# Altium PCB ESP32 with USBC.PcbDoc (part 3 of 3)
Units mil, origin at the board's own origin, x right, y up, seen from the top; angles counter-clockwise.
Board outline 2675 x 1175 mil, 4 copper layers (L1, L2, L3, L4), stack 61.583 mil thick; 64 components, 73 nets, 299 pads, 163 vias.
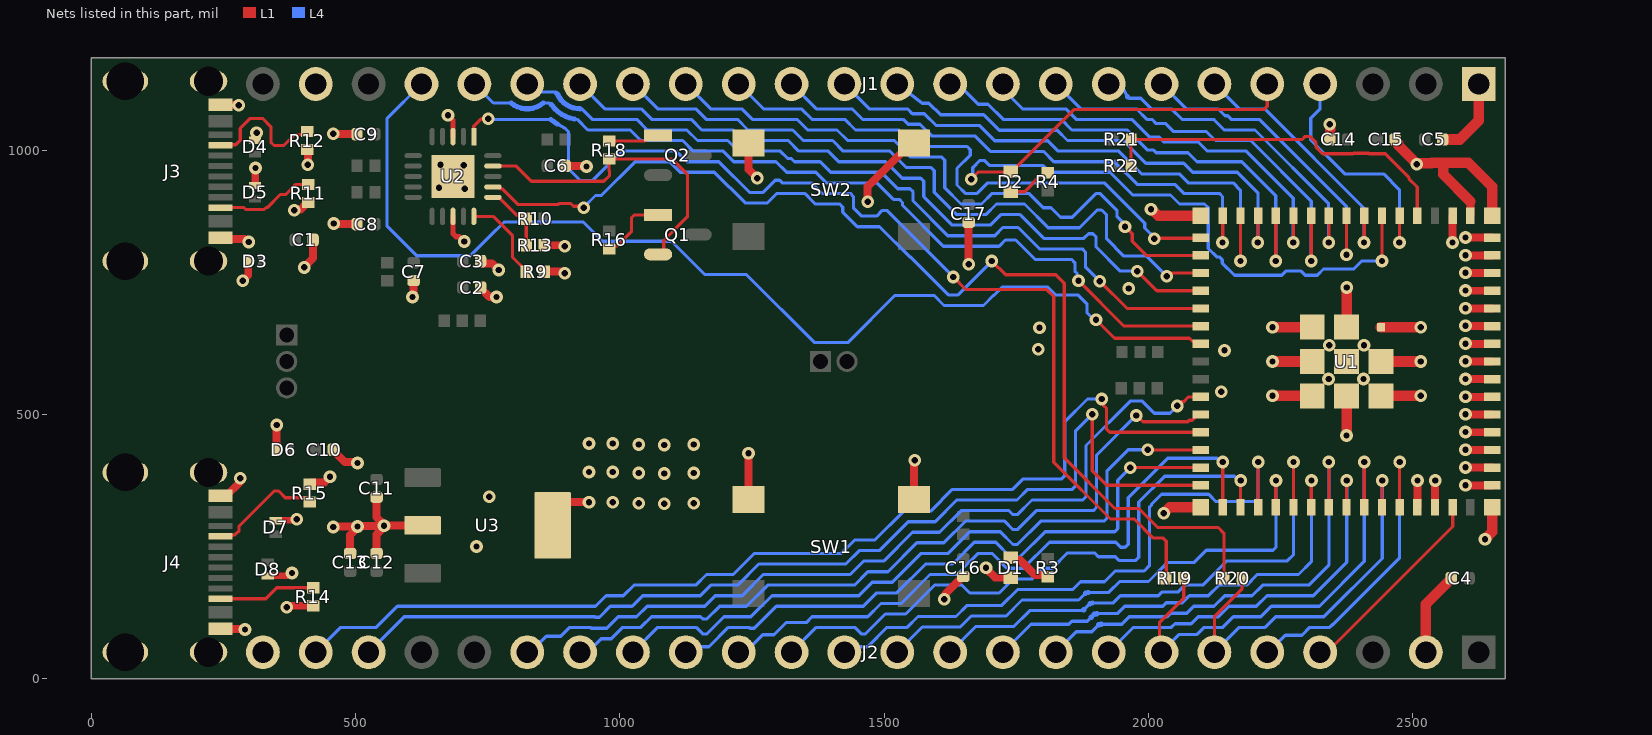
[diagram p4: the nets of this part, all layers, seen from the top]

## Via types
v1: diameter 24, hole 12, L1 to L4, tented both sides, 163 vias

## Nets (pads, with @x,y where several pads share a name; then routed paths per layer and width w, separated by ;. In a path a pad name is that pad's centre, name@x,y a point inside that pad or via, vN(x,y) a via of type N, cw(c..) or ccw(c..) an arc to the next point about the centre after c; other vN are vias at no path point) (continued)
GND: C1.2 C2.1 C3.2 C4.2 C5.2 C6.2 C7.2 C8.2 C9.2 C10.2 C11.1 C12.1 C13.1 C14.1 C15.2 C16.1 C17.2 D1.1 D3.1 D4.1 D5.1 D6.1 D7.1 D8.1 J1.1 J1.23 J2.2 J2.24 J3.A1B12 J3.B1A12 J3.S1 J3.S2 J3.S3 J3.S4 J4.A1B12 J4.B1A12 J4.S1 J4.S2 J4.S3 J4.S4 R9.2 R11.1 R12.1 R13.1 R14.1 R15.1 SW1.3 SW1.4 SW2.3 SW2.4 U1.1 U1.2 U1.42 U1.43 U1.46 U1.47 U1.48 U1.49 U1.50 U1.51 U1.52 U1.53 U1.54 U1.55 U1.56 U1.57 U1.58 U1.59 U1.60 U1.61 U1.62 U1.63 U1.64 U1.65 U1.66 U1.67 U1.68 U1.69 U1.70 U1.71 U1.72 U1.73 U2.3 U2.13 U2.21 U3.2 U3.4 | length 4561.6
  L1 w10.01: v1(675,1066) 684.59,1056.41 U2.3@684.59,1025.41 ; U2.13@684.59,874.59 684.59,841.86 690.45,836 697,836 v1(706,827) ; v1@1242,428 v1(1243.5,426.5)
  L1 w12: D8.1@334,194.41 371.16,194.41 376.75,200 v1(380,200) ; D7.1@349,299 349.89,299.89 387.48,299.89 v1(389,301.41)
  L1 w15: J4.B1A12@244.84,94.02 289.98,94.02 v1(291,93) ; J4.A1B12@244.84,345.98 255.67,345.98 281,371.32 281,378 v1(282,379) ; J3.B1A12@244.84,834.02 247.27,831.58 289.98,831.58 295.56,826 v1(298,826) ; J3.A1B12@244.84,1085.98 245.33,1085.49 278.51,1085.49 v1(279,1085) ; v1(287,753) 297.2,763.2 D3.1@297.2,790 ; D5.1@310,933 310.5,933.5 310.5,965.5 v1(311,966) ; D4.1@310,1018.8 310.89,1018.8 311.5,1019.41 311.5,1031.5 v1(313,1033) ; v1(351,480) 351,443.9 D6.1@352.41,442.49 ; v1(370,135) 372.99,137.99 R14.1@420,137.99 ; v1(384,886) 385.72,887.72 396.55,887.72 406.69,897.86 407.87,897.86 R11.1@411,900.99 ; v1(403,778) 403,778.69 420,795.69 C1.2@420,830 ; R12.1@409,1000.99 410,999.99 v1(410,972) ; R15.1@414,368.01 417.13,371.14 441.14,371.14 v1(452,382) ; C10.2@457.86,433 457.86,431.82 479.95,409.72 502.28,409.72 v1(504,408) ; v1(458,287) 458.5,287.5 503.5,287.5 v1(504,288) ; v1(458,1031) 459,1030 C9.2@503.07,1030 ; v1(459,861) 460,860 C8.2@503.07,860 ; C13.1@490,236.93 490,271.56 504,285.56 v1(504,288) ; C12.1@540,236.93 540,272.56 554,286.56 v1(554,289) ; C11.1@540,343.07 540,305.44 554,291.44 v1(554,289) ; v1(608,722) 610,724 C7.2@610,753.07 ; U3.2@626.97,290 626.47,289.5 554.5,289.5 v1(554,289) ; C2.1@736.93,740 736.93,738.82 753.75,722 v1(767,722) ; C3.2@736.93,790 736.93,788.82 740.06,785.69 758.31,785.69 v1(771,773) ; R9.2@857.01,770 893,770 v1(896,767) ; R13.1@857.01,820 894,820 v1(896,818) ; U3.4@873.03,290 873.03,307.05 899.98,334 v1(942,334) ; C6.2@896.93,970 897.43,969.5 936.5,969.5 v1(937,969) ; SW1.4@1243.5,338.58 v1(1243.5,426.5) ; SW2.4@1243.5,1013.58 1243.5,963.5 v1(1260,947) ; v1(1469,902) 1469,931.01 1551.57,1013.58 SW2.3@1556.5,1013.58 ; SW1.3@1556.5,338.58 1556.5,410.5 1558,412 v1(1558,413) ; v1(1614,150) 1616,152 1616,160.25 1648.82,193.07 C16.1@1650,193.07 ; v1(1660,784) C17.2@1660,863.07 ; v1(1693,210) 1694,209 1694,207.6 1710.3,191.3 D1.1@1740,191.3 ; C14.1@2343.07,1020 C14.1@2344.04,1020.96 ; C15.2@2466.93,1020 C15.2@2473.01,1013.92 ; U1.42@2508.9,324.41 v1@2508.9,374.57 ; U1.43@2542.36,324.41 v1@2542.36,374.57 ; C4.2@2573.07,188.82 C4.2@2573.07,190 ; v1@2575.83,825.43 U1.2@2575.83,875.59 ; v1@2600.47,365.75 U1.46@2650.63,365.75 ; v1@2600.47,399.21 U1.47@2650.63,399.21 ; v1@2600.47,432.68 U1.48@2650.63,432.68 ; v1@2600.47,466.14 U1.49@2650.63,466.14 ; v1@2600.47,499.61 U1.50@2650.63,499.61 ; v1@2600.47,533.07 U1.51@2650.63,533.07 ; v1@2600.47,566.54 U1.52@2650.63,566.54 ; v1@2600.47,600 U1.53@2650.63,600 ; v1@2600.47,633.46 U1.54@2650.63,633.46 ; v1@2600.47,666.93 U1.55@2650.63,666.93 ; v1@2600.47,700.39 U1.56@2650.63,700.39 ; v1@2600.47,733.86 U1.57@2650.63,733.86 ; v1@2600.47,767.32 U1.58@2650.63,767.32 ; v1@2600.47,800.79 U1.59@2650.63,800.79 ; v1@2600.47,834.25 U1.60@2650.63,834.25 ; U1.1@2609.29,875.59 2609.29,902.71 ; v1(504,288) 504.5,288.5 553.5,288.5 v1(554,289)
  L1 w20: v1(2005,888) 2006.08,888 2018.49,875.59 U1.63@2099.45,875.59 ; v1(2029,313) 2040.41,324.41 U1.64@2099.45,324.41 ; v1(2235,665) 2245,665 2245.04,664.96 U1.71@2310.08,664.96 ; v1@2245.04,535.04 U1.73@2310.08,535.04 ; v1@2245.04,600 U1.72@2310.08,600 ; v1(2343,1049) 2343.77,1048.23 2343.77,1021.23 C14.1@2344.04,1020.96 ; v1@2375.04,470 U1.70@2375.04,535.04 ; U1.69@2375.04,664.96 v1@2375.04,730 ; U1.68@2440,535.04 v1@2505.04,535.04 ; U1.67@2440,600 v1@2505.04,600 ; U1.66@2440,664.96 v1@2505.04,664.96 ; C15.2@2467.56,1018.19 2473.01,1012.73 2473.01,1009.07 2508,974.08 v1(2508,973) 2509.72,974.72 2535.51,974.72 2536.79,976 2558,976 ; J2.2@2525,50 2525,140.75 C4.2@2573.07,188.82 ; C5.2@2556.93,1020 2589,1020 2625,1056 J1.1@2625,1125 ; 2609.29,902.71 2558,954 2558,976 ; v1(2637,264) 2650.63,277.63 U1.65@2650.63,324.41 ; U1.62@2650.63,875.59 2650.63,930.37 2605,976 2558,976
  other v1: 729,250 1084,331 1036,332 1140,332 987,334 753,344 2600.04,366.18 2509.33,375 2542.8,375 1084,388 1036,389 1140,389 942,391 987,391 2600.04,399.65 2600.04,433.11 1084,442 1036,443 1140,443 942,445 987,445 2375,459.96 2600.04,466.57 2600.04,500.04 2600.04,533.5 2235,535.08 2515.08,535 2138,543 2341,567 2407,567 2600.04,566.97 2235,600.04 2515.08,599.96 2600.04,600.43 2144,621 1792,623 2342,631 2408,631 2600.04,633.9 1794,664 2515.08,664.92 2600.04,667.36 2600.04,700.83 2600.04,734.29 1963,738 2375.08,740.04 2600.04,767.76 2600.04,801.22 2575.39,825 2600.04,834.69 707,927 658,929 705,971 661,972
GPIO0: R21.2 R22.2 U1.4 | length 695.4
  L1 w6: R22.2@1967.01,970 R21.2@1967.01,1020 2291,1020 2296.86,1025.86 2305.14,1025.86 2317.34,1013.66 2317.34,1005.38 2329.53,993.19 2387.19,993.19 2388,994 2416.9,994 2417.71,993.19 2448.19,993.19 2493,948.38 2493,946 2508.9,930.1 U1.4@2508.9,875.59
GPIO1: J1.4 U1.5 | length 470.8
  L1 w6: v1(2475,825) 2475.43,825.43 U1.5@2475.43,875.59
  L4 w6: J1.4@2325,1125 2325,1078.18 2307.23,1060.41 2307.23,1019.06 2371.28,955 2445,955 2475,925 v1(2475,825)
GPIO2: D2.1 J1.5 U1.6 | length 1704.3
  L1 w6: v1(1665,945) 1678.7,958.7 D2.1@1740,958.7 1741.97,958.7 1860.13,1076.86 2219.14,1076.86 2225,1082.72 J1.5@2225,1125 ; v1(2441.97,790.04) U1.6@2441.97,875.59
  L4 w6: v1(1665,945) 1667.68,947.68 1667.68,966.68 1681.56,980.56 1689.84,980.56 1699.4,971 1800.01,971 1813.01,958 1927.46,958 1970.46,915 2041.86,915 2058.86,898 2106.35,898 2113.35,891 2113.35,813.82 2129.17,798 2134.14,798 2140,792.14 2140,786.11 2163.07,763.04 2252.36,763.04 2260.31,770.98 2288.98,770.98 2296.93,763.04 2319.48,763.04 2331.44,775 2388.57,775 2403.61,790.04 v1(2441.97,790.04)
GPIO3: J1.6 U1.7 | length 495.5
  L1 w6: v1@2408.5,825.43 U1.7@2408.5,875.59
  L4 w6: J1.6@2125,1125 2172,1078 2220,1078 2408.07,889.93 v1(2408.07,825)
GPIO4: J1.7 U1.8 | length 610.7
  L1 w6: v1(2375,802) U1.8@2375.04,875.59
  L4 w6: J1.7@2025,1125 2072,1078 2132,1078 2145,1065 2150,1065 2157,1058 2210,1058 2375.04,892.96 v1(2375,802) v1(2375,802)
GPIO5: J1.8 U1.9 | length 637.2
  L1 w6: v1@2341.57,825.43 U1.9@2341.57,875.59
  L4 w6: J1.8@1925,1125 1945.1,1125 1950.96,1119.14 1959.29,1102.25 1960.6,1100.93 1963.53,1098 1985.53,1098 2005.53,1078 2043.72,1078 2063.72,1058 2123.72,1058 2126.64,1055.07 2143.72,1038 2201.72,1038 2341.14,898.57 v1(2341.14,825)
GPIO6: J1.9 U1.10 | length 773.8
  L1 w6: v1(2308.11,790.04) U1.10@2308.11,875.59
  L4 w6: J1.9@1825,1125 1872,1078 1977.25,1078 1977.63,1077.62 1997.25,1058 2007,1058 2015,1050 2033,1050 2048,1035 2110,1035 2127,1018 2193.43,1018 2308.11,903.32 v1(2308.11,790.04)
GPIO7: J1.10 U1.11 | length 778.7
  L1 w6: v1@2274.65,825.43 U1.11@2274.65,875.59
  L4 w6: J1.10@1725,1125 1725,1115 1762,1078 1843.72,1078 1863.72,1058 1968.88,1058 2001.88,1025 2020,1025 2030,1015 2095,1015 2112,998 2185.15,998 2274.21,908.93 v1(2274.21,825)
GPIO8: J1.11 U1.12 | length 912.9
  L1 w6: v1(2241.18,790.04) U1.12@2241.18,875.59
  L4 w6: J1.11@1625,1125 1639.61,1125 1655.35,1109.27 1655.73,1109.27 1678.23,1086.77 1696.77,1086.77 1725.53,1058 1835.43,1058 1855.43,1038 1960.6,1038 1998.6,1000 2010,1000 2015,995 2075,995 2092,978 2176.86,978 2241.18,913.68 v1(2241.18,790.04)
GPIO9: J1.12 U1.13 | length 942.5
  L1 w6: v1@2207.72,825.43 U1.13@2207.72,875.59
  L4 w6: J1.12@1525,1125 1572.33,1088.73 1584.55,1088.73 1607.43,1066.77 1610.66,1066.77 1688.48,1066.77 ; 1654.95,1066.77 1688.48,1066.77 ; v1(2207.28,825) 2207.28,919.3 2168.58,958 2083.72,958 2066.72,975 1995.32,975 1952.32,1018 1847.15,1018 1827.57,1037.57 1717.67,1037.57 1688.48,1066.77
GPIO10: J1.13 U1.14 | length 1052
  L1 w6: v1(2174.25,790.04) U1.14@2174.25,875.59
  L4 w6: J1.13@1425,1125 1472,1078 1544.47,1078 1553.73,1068.73 1576.27,1068.73 1598.23,1046.77 1680.2,1046.77 1709.39,1017.57 1810,1017.57 1829.57,998 1944.03,998 1987.03,955 2058.43,955 2075.43,938 2160.29,938 2174.25,924.04 v1(2174.25,790.04)
GPIO11: J1.14 U1.15 | length 1040.8
  L1 w6: v1@2140.79,825.43 U1.15@2140.79,875.59
  L4 w6: J1.14@1325,1125 1372,1078 1439.36,1078 1459.36,1058 1536.18,1058 1545.45,1048.73 1567.98,1048.73 1589.95,1026.77 1671.91,1026.77 1701.11,997.57 1801.72,997.57 1821.29,978 1935.75,978 1978.75,935 2050.15,935 2067.15,918 2134.5,918 2140.35,912.14 v1(2140.35,825)
GPIO12: J1.15 U1.16 | length 1203.4
  L1 w6: v1(2011,832) 2012.13,833.13 2098.32,833.13 U1.16@2099.45,834.25
  L4 w6: J1.15@1225,1125 1272,1078 1343.72,1078 1363.72,1058 1426,1058 1446,1038 1527.9,1038 1559.13,1006.77 1657.14,1006.77 1663,1000.91 1663,990.28 1638,965.28 1638,933.82 1653.82,918 1676.18,918 1696.18,938 ; v1(2011,832) 2011,834.82 1993.32,852.5 1993.32,861.5 1916.82,938 1804.72,938 ; 1696.18,938 1804.72,938 ; 1696.18,938 1804.72,938
GPIO13: J1.16 U1.17 | length 1210.2
  L1 w6: v1(1956,855.21) 1969.63,841.58 1969.63,827.37 1996.21,800.79 U1.17@2099.45,800.79
  L4 w6: J1.16@1125,1125 1172,1078 1231,1078 1251,1058 1335.43,1058 1355.43,1038 1411,1038 1431,1018 1519.62,1018 1550.85,986.77 1609.14,986.77 1615,980.91 1615,928.53 1645.53,898 1684.47,898 1704.47,918 1774,918 1801,891 1815.82,891 1833.82,873 1856.18,873 1900.72,917.53 1909,917.53 1941,885.53 1941,874 1956,859 v1(1956,855.21)
GPIO14: J1.17 U1.18 | length 1322.6
  L1 w6: v1(2035,761) 2038.79,761 2045.11,767.32 U1.18@2099.45,767.32
  L4 w6: J1.17@1025,1125 1072,1078 1143.72,1078 1163.72,1058 1222.72,1058 1242.72,1038 1327.15,1038 1347.15,1018 1402.72,1018 1422.72,998 1511.33,998 1542.56,966.77 1589.14,966.77 1595,960.91 1595,920.25 1637.25,878 1692.75,878 1712.75,898 1765.72,898 1810.72,853 1869.78,853 1903.37,886.59 1911.66,886.59 1921,877.25 1921,832 1953.66,799.34 1996.66,799.34 v1(2035,761)
GPIO15: J1.18 U1.19 | length 1388.5
  L1 w6: v1(1979,771) 2016.14,733.86 U1.19@2099.45,733.86
  L4 w6: J1.18@925,1125 972,1078 1040.36,1078 1060.36,1058 1135.43,1058 1155.43,1038 1214.43,1038 1234.43,1018 1318.86,1018 1338.86,998 1394.43,998 1414.43,978 1503.05,978 1534.28,946.77 1569.14,946.77 1575,940.91 1575,911.96 1628.96,858 1701.04,858 1721.04,878 1757.43,878 1802.43,833 1878.07,833 1886.86,841.79 1895.14,841.79 1901,835.93 1901,816.79 1946.79,771 v1(1979,771)
GPIO16: J1.19 U1.20 | length 1489.4
  L1 w6: v1(1908,752) 1959.61,700.39 U1.20@2099.45,700.39
  L4 w6: J1.19@825,1125 840,1110 877.92,1110 880.85,1107.07 882.09,1105.83 ; 925,1078 928,1078 948,1058 1032.07,1058 1052.07,1038 1127.15,1038 1147.15,1018 1204,1018 1224,998 1304,998 1318,984 1324.58,984 1330.58,978 1379,978 1399,958 1494.76,958 1526,926.77 1549.14,926.77 1555,920.91 1555,903.68 1620.68,838 1709.32,838 1724.89,853.57 1753.57,853.57 1794.15,813 1875.14,813 1881,807.14 1881,779 v1(1908,752)
  L4 w10: 882.09,1105.83 ccw(c925,1125) 925,1078
GPIO17: J1.20 U1.21 | length 1595.9
  L1 w6: v1(1868,753) 1954.07,666.93 U1.21@2099.45,666.93
  L4 w6: J1.20@725,1125 761,1089 794.78,1089 ; 855.22,1089 867.39,1089 870.32,1086.07 870.85,1085.54 ; 914.18,1058.88 919.75,1057.97 939.72,1038 1020,1038 1040,1018 1118.86,1018 1138.86,998 1195.72,998 1215.72,978 1295.72,978 1315.72,958 1370.72,958 1390.72,938 1486.48,938 1517.71,906.77 1529.14,906.77 1535,900.91 1535,895.4 1612.4,818 1717.6,818 1729.54,829.93 1748.93,829.93 1785.86,793 1855.14,793 1861,787.14 1861,770.72 1865.32,766.39 1865.32,755.68 v1(1868,753)
  L4 w10: 794.78,1089 ccw(c825,1125) 855.22,1089 ; 870.85,1085.54 ccw(c925,1125) 914.18,1058.88
GPIO18: J1.21 U1.22 | length 2093
  L1 w6: v1(1901,679) 1935.94,644.06 2077.94,644.06 2085.66,636.34 2096.57,636.34 U1.22@2099.45,633.46
  L4 w6: J1.21@625,1125 560,1060 560,856 577,839 580,836 616,800 717.18,800 753.18,836 781.18,864 809,864 931.05,864 967.39,827.66 1097.98,827.66 1160.98,764.66 1239.67,764.66 1368.67,635.66 1431.47,635.66 1520.82,725 1594.5,725 1613.5,706 1688.11,706 1707.11,725 1708,725 1723.68,740.68 1809.61,740.68 1824.28,726 1866.59,726 1884.16,708.43 1884.16,691.86 1890.02,686 1890.21,686 1897.21,679 v1(1901,679)
GPIO21: J2.19 U1.25 | length 1558.2
  L1 w6: v1(2055,516) 2063,524 2067,524 2076.04,533.04 U1.25@2099.41,533.04
  L4 w6: J2.19@825,50 831,50 861.23,80.23 888.77,80.23 905.53,97 944.47,97 946,95.47 975.72,95.47 997.25,117 1031.72,117 1051.72,137 1160.68,137 1180.68,157 1231.44,157 1271.44,197 1435.83,197 1461.13,222.3 1499.17,222.3 1553.86,277 1604.86,277 1645.86,318 1736.32,318 1743.95,310.37 1752.23,310.37 1779.86,338 1876.14,338 1882,343.86 1882,441.18 1965.82,525 1988.41,525 2011.41,502 2041,502 v1(2055,516)
GPIO26: J2.18 U1.26 | length 1446.1
  L1 w6: v1(1977,498) 1978,498 1989.86,486.14 2074.61,486.14 2077.49,489.02 2082.84,489.02 2088.7,494.87 2088.7,496.73 2091.57,499.61 U1.26@2099.45,499.61
  L4 w6: J2.18@925,50 939.61,50 965.08,75.47 984,75.47 1005.53,97 1040,97 1060,117 1152.75,117 1156.72,113.04 1165,113.04 1188.96,137 1239.73,137 1279.73,177 1444.11,177 1469.42,202.3 1507.45,202.3 1562.15,257 1613.15,257 1654.15,298 1728.04,298 1743.95,282.09 1752.23,282.09 1788.15,318 1896.14,318 1902,323.86 1902,423 v1(1977,498)
GPIO33: J2.17 U1.28 | length 1315.7
  L1 w6: v1(1999,433) 1999.32,432.68 U1.28@2099.45,432.68
  L4 w6: J2.17@1025,50 1072,97 1144.47,97 1156.72,84.75 1165,84.75 1197.25,117 1248.01,117 1288.01,157 1452.4,157 1477.7,182.3 1515.74,182.3 1570.43,237 1621.43,237 1662.43,278 1719.75,278 1743.95,253.8 1752.23,253.8 1796.43,298 1916.14,298 1922,303.86 1922,393.18 1961.82,433 v1(1999,433)
GPIO34: J2.16 U1.29 | length 1197
  L1 w6: v1(1966,399) 1966.21,399.21 U1.29@2099.45,399.21
  L4 w6: J2.16@1125,50 1135.33,60.33 1168.86,60.33 1205.53,97 1244.47,97 1246.24,95.23 1254.52,95.23 1296.29,137 1460.68,137 1485.98,162.3 1524.02,162.3 1578.72,217 1629.72,217 1670.72,258 1711.47,258 1739.33,230.14 1756.86,230.14 1804.72,278 1936.14,278 1942,283.86 1942,375 v1(1966,399)
GPIO35: J2.15 U1.31 | length 1239.3
  L1 w6: U1.31@2140.79,324.41 v1(2140.79,409.96)
  L4 w6: J2.15@1225,50 1237.58,50 1270.81,83.23 1291.77,83.23 1314.53,106 1352.72,106 1363.72,117 1468.96,117 1494.27,142.3 1532.3,142.3 1587,197 1638,197 1678,237 1704.18,237 1732.45,208.73 1763.73,208.73 1813,258 1938.31,258 1947.86,248.46 1956.14,248.46 1962,254.31 1962,342.57 2036.43,417 2129.96,417 2137,409.96 v1(2140.79,409.96)
GPIO36: J2.14 U1.32 | length 1136.8
  L1 w6: U1.32@2174.25,324.41 v1@2174.25,374.57
  L4 w6: J2.14@1325,50 1372,97 1444.47,97 1456.72,84.75 1465,84.75 1502.55,122.3 1540.74,122.3 1595.43,177 1647.41,177 1662.41,162 1717.79,162 1744.52,188.73 1780.73,188.73 1801,209 1818,209 1847,238 1898.18,238 1905.59,230.59 1937.44,230.59 1944.3,223.73 1976.14,223.73 1982,229.59 1982,334.28 2030.72,383 2129.56,383 2129.6,382.96 2151.97,382.96 2152.01,383 2162.9,383 2170.9,375 v1(2174.69,375)
GPIO37: J2.13 U1.33 | length 1135.2
  L1 w6: U1.33@2207.72,324.41 v1(2207.72,409.96)
  L4 w6: J2.13@1425,50 1435.33,60.33 1468.86,60.33 1505.53,97 1543.72,97 1564.36,117.64 1636.07,117.64 1657.07,138.64 1722.72,138.64 1752.81,168.73 1857,168.73 1871.73,183.46 1917.04,183.46 1937.31,203.73 1992,203.73 2002,213.73 2002,324.18 2006,328.18 2006,330 2025,349 2114,349 2128,335 2201.86,335 2207.72,340.86 v1(2207.72,409.96)
GPIO38: J2.12 U1.34 | length 974.9
  L1 w6: U1.34@2241.18,324.41 v1@2241.18,374.57
  L4 w6: J2.12@1525,50 1572.64,97.64 1644.36,97.64 1665.36,118.64 1731,118.64 1761.09,148.73 1868.17,148.73 1881.22,161.78 ; 1881.24,161.79 1886.05,162.99 ; 1886.08,163 1894.23,163 1925.32,163.46 1945.6,183.73 2000.28,183.73 2036.55,220 2087,220 2109.86,242.86 2235.76,242.86 2241.61,248.72 v1(2241.61,375)
GPIO39: J2.11 U1.35 | length 986.5
  L1 w6: U1.35@2274.65,324.41 v1(2274.65,409.96)
  L4 w6: J2.11@1625,50 1673.64,98.64 1745.36,98.64 1775.45,128.73 1876.45,128.73 1877.68,129.97 ; 1877.86,130.15 1889.49,141.78 1894.35,142.99 ; 1894.38,143 1933.73,143.58 1947.15,157 2018.86,157 2025.6,163.73 2055.73,163.73 2069,177 2103,177 2148.86,222.86 2263,222.86 2274.65,234.5 v1(2274.65,409.96)
  L4 w10: 1877.68,129.97 cw(c1906.06,101.77) 1877.86,130.15
GPIO40: J2.10 U1.36 | length 858
  L1 w6: U1.36@2308.11,324.41 v1@2308.11,374.57
  L4 w6: J2.10@1725,50 1778,103 1849.72,103 1855.45,108.73 1884.73,108.73 1891.86,115.86 ; 1891.97,115.97 1897.77,121.77 ; 1897.79,121.78 1902.66,123 ; 1902.68,123 1941.43,123 1955.43,137 2027.15,137 2033.88,143.73 2064.43,143.73 2077.7,157 2113.63,157 2133.63,177 2186,177 2206,197 2284,197 2308.54,221.54 v1(2308.54,375)
  L4 w10: 1891.86,115.86 cw(c1906.06,101.77) 1891.97,115.97 ccw(c1906.06,101.77) 1891.86,115.86
GPIO41: J2.9 U1.37 | length 870.2
  L1 w6: U1.37@2341.57,324.41 v1(2341.57,409.96)
  L4 w6: J2.9@1825,50 1863.73,88.73 1893.02,88.73 1906.06,101.77 ; 1910.96,103 1949.72,103 1952.65,105.93 1963.72,117 2035.43,117 2042.17,123.73 2072.72,123.73 2085.98,137 2124.29,137 2144.29,157 2196.15,157 2216.15,177 2303.72,177 2341.57,214.86 v1(2341.57,409.96)
  L4 w10: 1906.06,101.77 cw(c1931.24,11.48) 1910.96,103 ccw(c1931.24,11.48) 1906.06,101.77
GPIO42: J2.8 U1.38 | length 725.8
  L1 w6: U1.38@2375.04,324.41 v1@2375.04,374.57
  L4 w6: J2.8@1925,50 1972,97 2043.72,97 2050.45,103.73 2081,103.73 2094.27,117 2132.57,117 2152.57,137 2204.43,137 2224.43,157 2312,157 2375.47,220.47 v1(2375.47,375)
GPIO45: J2.5 U1.41 | length 591.3
  L1 w6: U1.41@2475.43,324.41 v1(2475.43,409.96)
  L4 w6: J2.5@2225,50 2227,50 2259.23,82.23 2290.77,82.23 2305.53,97 2343,97 2348,102 2348.87,102 2475.43,228.57 v1(2475.43,409.96)
GPIO46: J2.4 U1.44 | length 385.9
  L1 w6: J2.4@2325,50 2338,50 2575.83,287.83 U1.44@2575.83,324.41
GPIO47: J2.23 U1.27 | length 1987
  L1 w6: v1(1912,529) 1914.68,526.32 1914.68,517.51 1916.68,515.5 1921,511.18 1921,472 1926.86,466.14 U1.27@2099.45,466.14
  L4 w6: J2.23@425,50 472,97 539.36,97 579.36,137 954.11,137 974.11,157 1007,157 1027,177 1144.11,177 1164.11,197 1214.87,197 1254.87,237 1419.26,237 1444.56,262.3 1482.6,262.3 1537.29,317 1588.29,317 1629.29,358 1743.29,358 1763.29,378 1836.14,378 1842,383.86 1842,486.18 1884.82,529 v1(1912,529)
GPIO48: J2.22 U1.30 | length 1940.7
  L1 w6: v1(1894,500) 1894,393 1921.25,365.75 U1.30@2099.45,365.75
  L4 w6: J2.22@525,50 592,117 952.75,117 953.43,116.32 961.71,116.32 982.39,137 1023.43,137 1043.43,157 1152.4,157 1172.4,177 1223.16,177 1263.16,217 1427.54,217 1452.85,242.3 1490.88,242.3 1545.58,297 1596.58,297 1637.58,338 1751.58,338 1771.58,358 1856.14,358 1862,363.86 1862,468 v1(1894,500)
NetD1_2: D1.2 R3.1 | length 84.8
  L1 w15: D1.2@1740,228.7 1744.31,224.39 1757.25,224.39 1785.52,196.12 1806.87,196.12 R3.1@1810,192.99
NetD2_2: D2.2 R4.1 | length 85.8
  L1 w6: D2.2@1740,921.3 1766.3,921.3 1779.14,934.14 1779.14,935.78 1794.73,951.38 1804.37,951.38 R4.1@1810,957.01
NetJ3_A5: J3.A5 R12.2 | length 247.9
  L1 w6: J3.A5@244.84,1009.21 245.75,1010.12 273.28,1010.12 282,1018.83 282,1041 301,1060 324.18,1060 340,1044.18 340,1014.47 345.86,1008.62 364.38,1008.62 379.12,1023.35 379.12,1023.52 384.98,1029.38 403.37,1029.38 R12.2@409,1035.01
NetJ3_B5: J3.B5 R11.2 | length 187.3
  L1 w6: J3.B5@244.84,891.1 289.22,891.1 292.8,887.52 327.2,887.52 330.78,891.1 333.1,891.1 358,916 368.36,916 387.36,935.01 R11.2@411,935.01
NetJ4_A5: J4.A5 R15.2 | length 218.5
  L1 w6: J4.A5@244.84,269.21 245.75,270.12 266.46,270.12 268.34,271.99 272.04,271.99 280,279.96 280,288.71 346.29,355 354.57,355 367.2,342.38 404.43,342.38 412.82,333.99 R15.2@414,333.99
NetJ4_B5: J4.B5 R14.2 | length 183.8
  L1 w6: J4.B5@244.84,151.1 330.2,151.1 351.1,172.01 R14.2@420,172.01
NetQ1_1: Q1.1 R16.1 | length 134.6
  L1 w6: R16.1@980,812.99 985.63,818.62 995.27,818.62 1022,845.35 1022,871.54 1027.86,877.4 Q1.1@1072.58,877.4
NetQ2_1: Q2.1 R18.1 | length 96.9
  L1 w6: R18.1@980,1017.01 1046.73,1017.01 1057.12,1027.4 Q2.1@1072.58,1027.4
NetR9_1: R9.1 U2.15 | length 167
  L1 w6: U2.15@723.96,874.59 760.41,874.59 797.36,837.64 797.36,796.81 822.99,771.18 R9.1@822.99,770
RTS_FTDI: Q1.2 R18.2 U2.19 | length 605.9
  L1 w6: U2.19@760,969.69 804.19,969.69 832.87,941 970,941 980.86,951.86 980.86,960.14 980,961 R18.2@980,982.99 1099.01,982.99 1128,954 1128,873.63 1083.23,828.86 1083.23,808.38 1077.44,802.6 Q1.2@1072.58,802.6
RXD_FTDI: R19.2 U2.1 | length 2046.4
  L1 w6: U2.1@723.96,1025.41 723.96,1044.96 738,1059 v1(751,1059) ; v1(1631,760) 1655,736 1808,736 1821,723 1821,409.43 1928.43,302 1973.53,302 2009.53,266 2028.14,266 2034,260.14 2034,191.01 R19.2@2032.99,190
  L4 w6: v1(751,1059) 752,1058 809,1058 869.5,1058 ; 882.26,1049.22 897.14,1040.83 903,1034.97 903,964.82 925.82,942 948.18,942 1004.18,998 1107.22,998 1127.22,978 1187.43,978 1245.43,920 1271.18,920 1294.17,942.98 1302.45,942.98 1307.43,938 1362.43,938 1382.43,918 1436.14,918 1442,912.14 1442,890.82 1457.82,875 1485.95,875 1496.83,885.89 1505.12,885.89 v1(1631,760)
  L4 w10: 869.5,1058 ccw(c925,1125) 882.26,1049.22
TXD_FTDI: R20.2 U2.17 | length 2081
  L1 w6: U2.17@760,930.32 771.3,930.32 774.99,926.63 778.06,926.63 807.88,896.81 882.63,896.81 884.82,899 907.18,899 912.51,893.68 929.32,893.68 v1(932,891) ; v1(1704,790) 1730,764 1825.14,764 1841,748.14 1841,417.72 1936.72,322 1981.82,322 2017.82,286 2132,286 2142.99,275.01 R20.2@2142.99,190
  L4 w6: v1(932,891) 932,891.75 954.26,914 965.28,914 1029.28,978 1094.22,978 1114.22,958 1179.15,958 1237.15,900 1279.47,900 1297.47,918 1349.73,918 1369.73,898 1416.14,898 1422,892.14 1422,882.53 1449.53,855 1491.43,855 1548.43,798 1549.79,798 1621.79,726 1640.18,726 1704,789.82 v1(1704,790)
U0RXD: J2.6 R20.1 U1.40 | length 750.2
  L1 w6: J2.6@2125,50 2125,117 2177.01,169.01 R20.1@2177.01,190 ; U1.40@2441.97,324.41 v1@2441.97,374.57
  L4 w6: J2.6@2125,50 2172,97 2221,97 2241,117 2332,117 2442.4,227.4 v1(2442.4,375)
U0TXD: J2.7 R19.1 U1.39 | length 889.1
  L1 w6: J2.7@2025,50 2021,54 2021,106 2067.01,152.01 R19.1@2067.01,190 ; U1.39@2408.5,324.41 v1(2408.5,409.96)
  L4 w6: J2.7@2025,50 2058.73,83.73 2092.27,83.73 2105.53,97 2140.86,97 2160.86,117 2212.72,117 2232.72,137 2323.72,137 2408.5,221.79 v1(2408.5,409.96)
VBUS_SENSE: R10.1 R13.2 U2.16 | length 130.5
  L1 w6: U2.16@760,910.63 771.3,910.63 805.12,876.81 817.36,876.81 822.99,871.18 R10.1@822.99,870 R13.2@822.99,820
pads on no net: J1.24 J3.A8 J3.B8 J4.A8 J4.B8 U2.2 U2.4 U2.5 U2.6 U2.7 U2.14

## Polygon pours and split planes (outlines as drawn)
"+3V3 _REG" on L1 "+3V3__REG_L01_P003" (solid, pour order 3): 454,216 454,150 684,150 685,151 684,152 684,220
GND on L1 "GND_L01_P008" (solid, pour order 8): 677,335 588,335 563.53,359.47 523.21,359.47 453,304 434.29,294 434.29,279.44 469.86,243.87 469.86,227.86 475.95,227.86 487.13,216.68 491.2,220.75 629.03,220.75 734.85,326.57 734.85,366.58 788.21,366.58 832.67,322.12 832.67,212.75 846.01,199.41 851.34,204.74 918.74,204.74 1001,287 1180,287 1190,297 1187,300 1187,485 906,485 808,387 713,387
GND on L1 "GND_L01_P007" (solid, pour order 7): 2213,759 2213,443 2214,442 2547,442 2547,758 2542,763 2539,760 2212,760
+5V_VBUS2 on L1 "+5V_VBUS2_L01_P006" (solid, pour order 6): 345,574 351,568 351,509 358,509 379,488 368,477 368,381 382,395 417,395 444,422 440.75,425.25 436,509 435.56,516.67 380.28,574.32 373.8,574.32
+5V_VBUS1 on L1 "+5V_VBUS1_L01_P005" (solid, pour order 5): 311,853.84 311,624 382,624 408,598 427,598 427,683 429,685 426,688 390,688 390,805 389,806 401,818 403,818 403,850 402,851 400,849 345,849 316,878
+5V on L1 "+5V_L01_P004" (solid, pour order 4): 350.55,619.45 373.6,623.52 391,613 394,588 551,431 551,391 584,391 585,390 589,390 589,403 660,403 665,398 665,362 591,362 584,362 575,366 543,366 539,362 537,364 525,364 525,391 529,395 528,396 528,430 379,579 377,577 351,582 347.55,616.45
+3V3_FTDI on L1 "+3V3_FTDI_L01_P002" (solid, pour order 2): 576,739 530.8,739 517.57,748.73 508.5,765.46 508.5,817.5 513.5,822.5 517,828 524,832 524,852 523,859 526,872 534,876 535,875 578,918 585,918 585,898 595,888 596,889 617.5,885.5 619.5,868.5 590,836 556,836 554,836 552,834 543,817.5 541.41,814.59 539.21,810.79 533.5,796.5 531.28,788.23 531.28,771.66 536,769 561,769 565,765 575,765 575,761 576,760
+3V3_FTDI on L1 "+3V3_FTDI_L01_P001" (solid, pour order 1): 875,1038 875,955 835,955 803,987 800,987 800,1008 806,1014 806,1038
+3V3 on L1 "+3V3_L01_P000" (solid, pour order 0): 2364,1005 2364,1070 2445,1067 2445,1036 2445,1005
GND on L2 "GND_L02_P011" (solid, remove dead copper, pour order 11): 6,1164 6,38 40,4 2674,4 2674,1155 2660,1169 4,1169
+3V3 on L2 "+3V3_L02_P009" (solid, remove dead copper, pour order 9): 2664,1165 2663,1166 2660,1163 882,1163 882,997 898,981 1113,981 1276,818 1283,825 1445,825 1445,704 1448,701 1448,658 1404,614 1403,614 1403,584 1415,572 1459,572 1459,576 1515,632 1515,829 1519,833 1829,833 1832,830 1871,869 1929,869 1940,875 1960,879 1960,885 2025,950 2159,950 2165,944 2171,950 2407,950 2407,966 2453,1012 2474,1012 2496,990 2518,990 2518,988 2548,958 2552,958 2593,917 2593,912 2595,912 2619,888 2619,522 2620,521 2618,519 2618,368 2620,366 2619,365 2619,361 2618,361 2579,322 2474,249 2275,178 2283,83 2283,21 2283,13 2283,12 2663,13 2664,12
"+3V3 _REG" on L2 "+3V3__REG_L02_P010" (solid, pour order 10): 459,219 456,216 456,122 1106,122 1112,128 1093,147 1093,285 880,285 815,220 457,220
GND on L3 (split plane): 2674.95,0.05 0.05,0.05 0.05,1174.95 2674.95,1174.95

## Silkscreen, mask and mechanical layers (free items; w line width, h text height)
Top Overlay:
  lines w5: 725,100 725,115 ; 725,1060 725,1075 ; 1225,100 1225,115 ; 1225,1060 1225,1075 ; 1725,100 1725,115 ; 1725,1060 1725,1075 ; 2225,100 2225,115 ; 2225,1060 2225,1075
  text "J1" at -194,1031 h40
  text "J1" at 2231,1006 h40
  text "USER" at 1706,831 h40
  text "BOOT/USR" at 1231,731 h40
  text "UART" at 56,706 h40
  text "USB1" at 431,656 h40
  text "+5V" at 431,581 h40
  text "REG" at 1181,581 h40
  text "3V3" at 1506,581 h40
  text "USB2" at 431,506 h40
  text "ESP" at 81,431 h40
  text "RESET" at 1331,406 h40
  text "POWER" at 1731,281 h40
  text "J2" at -169,131 h40
  text "J2" at 2256,106 h40
Bottom Overlay:
  text "NC" at 349,1054 h40 r90
  text "GND" at 449,1054 h40 r90
  text "5V" at 549,1054 h40 r90
  text "IO18" at 649,1054 h40 r90
  text "IO17" at 749,1054 h40 r90
  text "IO16" at 849,1054 h40 r90
  text "IO15" at 949,1054 h40 r90
  text "IO14" at 1049,1054 h40 r90
  text "IO13" at 1149,1054 h40 r90
  text "IO12" at 1249,1054 h40 r90
  text "IO11" at 1349,1054 h40 r90
  text "IO10" at 1449,1054 h40 r90
  text "IO9" at 1549,1054 h40 r90
  text "IO8" at 1649,1054 h40 r90
  text "IO7" at 1749,1054 h40 r90
  text "IO6" at 1849,1054 h40 r90
  text "IO5" at 1949,1054 h40 r90
  text "IO4" at 2049,1054 h40 r90
  text "IO3" at 2149,1054 h40 r90
  text "IO2" at 2249,1054 h40 r90
  text "IO1" at 2349,1054 h40 r90
  text "IO0" at 2449,1054 h40 r90
  text "3V3" at 2549,1054 h40 r90
  text "GND" at 2649,1054 h40 r90
  text "<-----PIN1----->" at 2649,899 h40 r90
  text "(C) JAISHIL SHAH" at 1219,516 h40
  text "TAMU" at 1649,451 h40
  text "USB-" at 644,269 h40 r90
  text "USB+" at 744,269 h40 r90
  text "IO47" at 444,264 h40 r90
  text "IO48" at 544,259 h40 r90
  text "IO21" at 844,259 h40 r90
  text "IO26" at 944,259 h40 r90
  text "IO33" at 1044,259 h40 r90
  text "IO34" at 1144,259 h40 r90
  text "IO35" at 1244,259 h40 r90
  text "IO36" at 1344,259 h40 r90
  text "IO37" at 1444,259 h40 r90
  text "IO38" at 1544,259 h40 r90
  text "IO39" at 1644,259 h40 r90
  text "IO40" at 1744,259 h40 r90
  text "IO41" at 1844,259 h40 r90
  text "IO42" at 1944,259 h40 r90
  text "TXD" at 2044,259 h40 r90
  text "RXD" at 2144,259 h40 r90
  text "IO45" at 2244,259 h40 r90
  text "IO46" at 2344,259 h40 r90
  text "EN" at 2444,234 h40 r90
  text "GND" at 2544,234 h40 r90
  text "3V3" at 2644,234 h40 r90
  text "GND" at 334,229 h40 r90
Board Shape:
  the board outline again, w20

## Text inside footprints (layer, text, board x,y; h text height)
J1: Bottom Overlay "1" at 2606,1201 h40 r270
J2: Bottom Overlay "1" at 2605,-34 h40 r270
J6: Top Overlay "1" at 298,628 h40